# EAGLE board brick_analog_limitswitch (EAGLE 7.4.0)
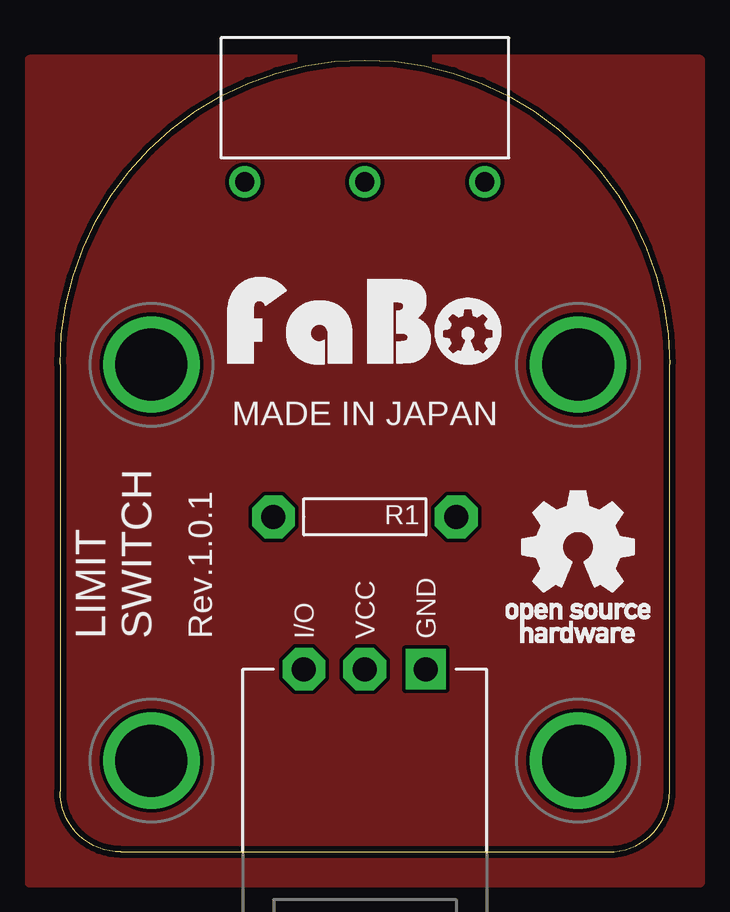
[diagram p0: board, top side]
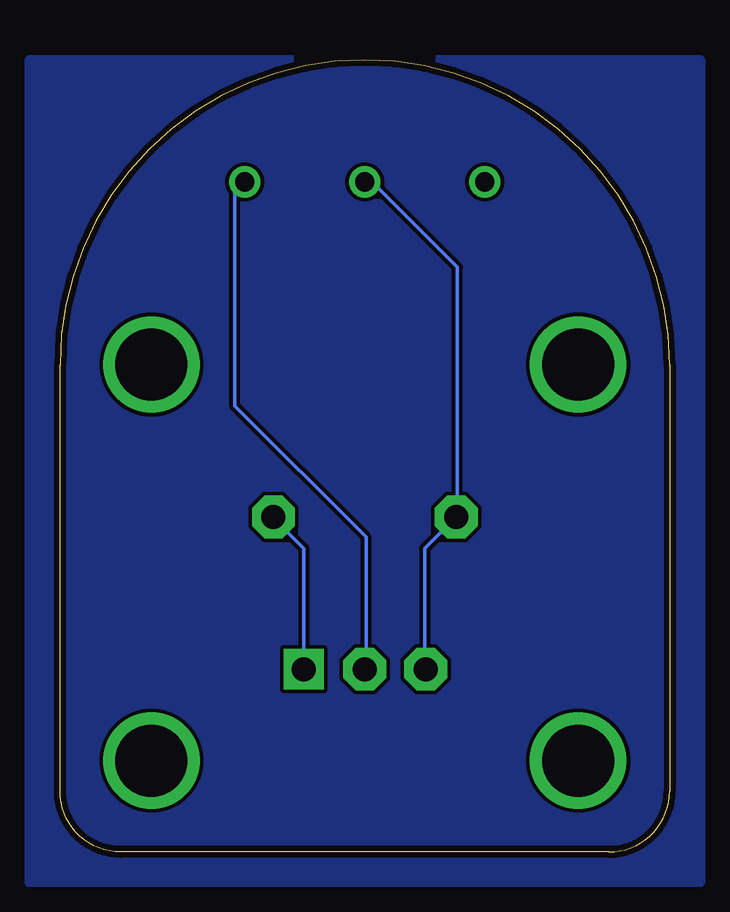
[diagram p1: board, bottom side, seen from below]

Size 25.4 x 33.02 mm. Coordinates in mm from the lower left corner, seen from the top.
Copper layers (1*16): Top 0.035mm / dielectric 1.5mm / Bottom 0.035mm
Design rules "Elecrow_2-layer_eagle_rule": minimum track width 6mil, minimum drill 12mil, track to track 6mil, track to pad 6mil, pad to pad 6mil, via to via 6mil, smd to smd 0mil, copper to edge 10mil, drill to drill 10mil, minimum pad ring 10mil, minimum via ring 6mil, stop-mask expansion 2mil, vias tented up to drill 100mil, thermal gap 10mil

## Footprints (pad centres in the part's own frame; a part is rotated, then mirrored left to right if it is on the bottom)
BRICK_3PIN = drill 1 pad 1.676 square: GND 2.54,-8.89 | drill 1 pad 1.778 octagon: IN/OUT -2.54,-8.89; VCC 0,-8.89 | drill 3 pad 3.81: P$5 -8.89,3.81; P$6 8.89,3.81; P$7 -8.89,-12.7; P$8 8.89,-12.7
RES-AXL-REGULAR = drill 1 pad 1.778 octagon: P$1 -3.81,0; P$2 3.81,0
LIMIT-SWITCH = drill 0.8: NC 5,0; NO 0,0; VCC -5,0

## Placement (x,y rotation side)
J1  [BRICK_3PIN]  12.7,16.51 0 top
R1  10k  [RES-AXL-REGULAR]  12.7,13.97 180 top
U$2  [LOGO_FABO_M]  12.7,20.32 0 top
U$3  LIMIT-SWITCH  [LIMIT-SWITCH]  12.7,27.94 180 top
U$4  [LOGO_OSHW_T_M]  21.59,12.7 0 top

## Library data of the parts
J1 U$4 = Gclue
R1 = FaBo-etc
U$2 = FaBo
U$3 = FaBo-Switch

## Nets
N$1: J1.VCC U$3.VCC
N$2: J1.GND R1.P$1
N$3: J1.IN/OUT R1.P$2 U$3.NO

## Tracks (layer width: path | path; a pad name or v marks a point on that pad's centre or on a via)
GND
  pour Top: -1.27,-1.27 26.67,-1.27 26.67,33.02 -1.27,33.02
N$1
  Bottom 0.152: U$3.VCC 17.83,27.89 18.11,27.61 18.11,18.59 12.65,13.13 12.65,7.62 J1.VCC
N$2
  Bottom 0.152: J1.GND 15.24,12.65 16.46,13.87 R1.P$1
N$3
  Bottom 0.152: U$3.NO 12.65,27.89 12.34,27.89 8.84,24.38 8.84,14.02 R1.P$2 10.21,12.65 10.21,7.62 J1.IN/OUT
N$4
  pour Bottom: -1.27,-1.27 26.67,-1.27 26.67,33.02 -1.27,33.02

## Text on the board
tPlace: MADE IN JAPAN | LIMIT / SWITCH | Rev.1.0.1